# Altium PCB NUC_power.PcbDoc
Units mm, origin at the board's own origin, x right, y up, seen from the top; angles counter-clockwise.
Board outline 91 x 23 mm, 4 copper layers (Top Layer, Internal Plane 1, Internal Plane 2, Bottom Layer), stack 1.782 mm thick; 11 components, 5 nets, 31 pads, 2 vias.
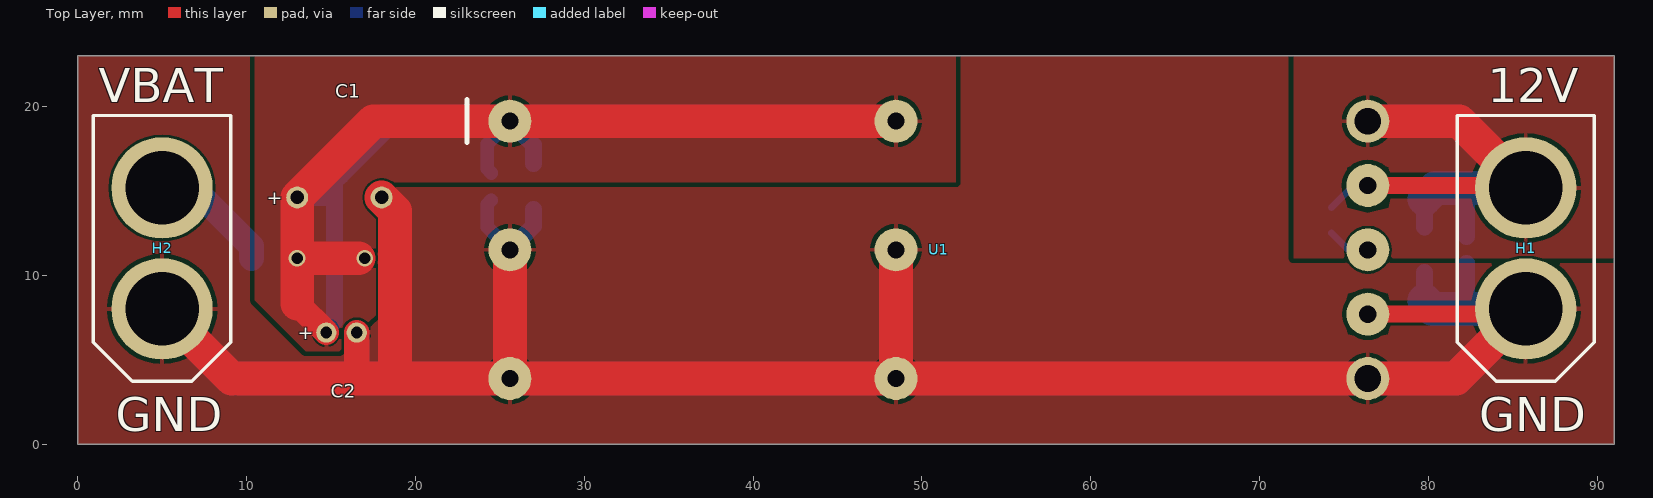
[diagram p0: Top Layer view]
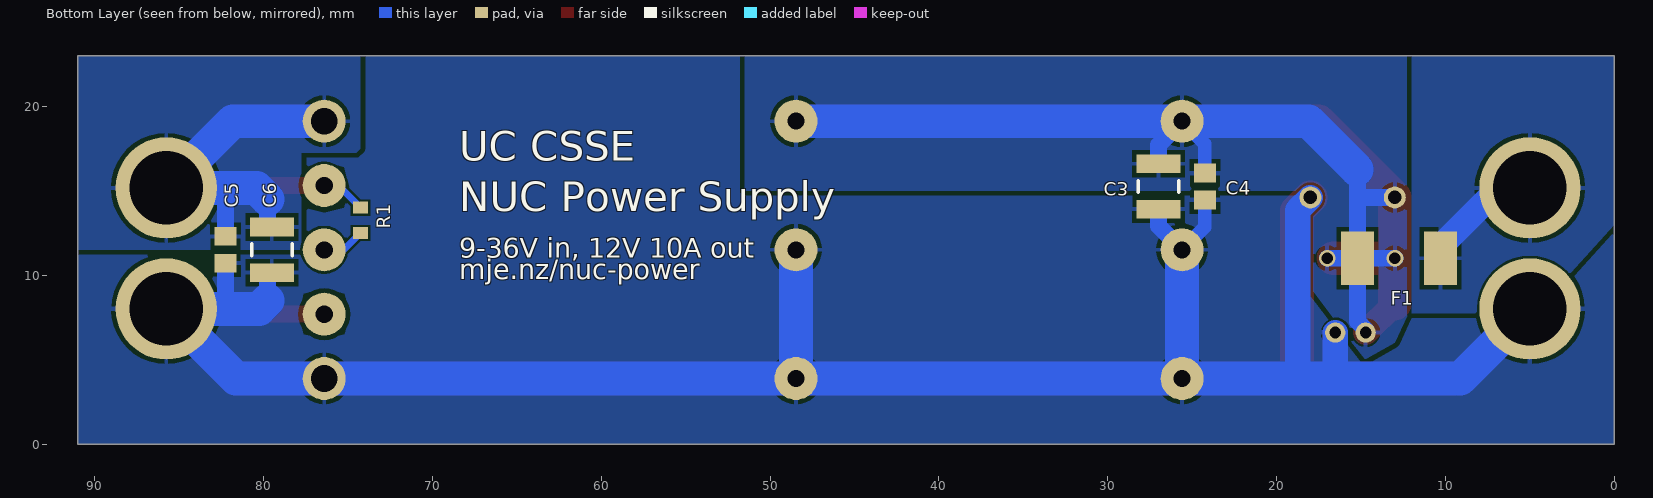
[diagram p1: Bottom Layer view, seen from below]
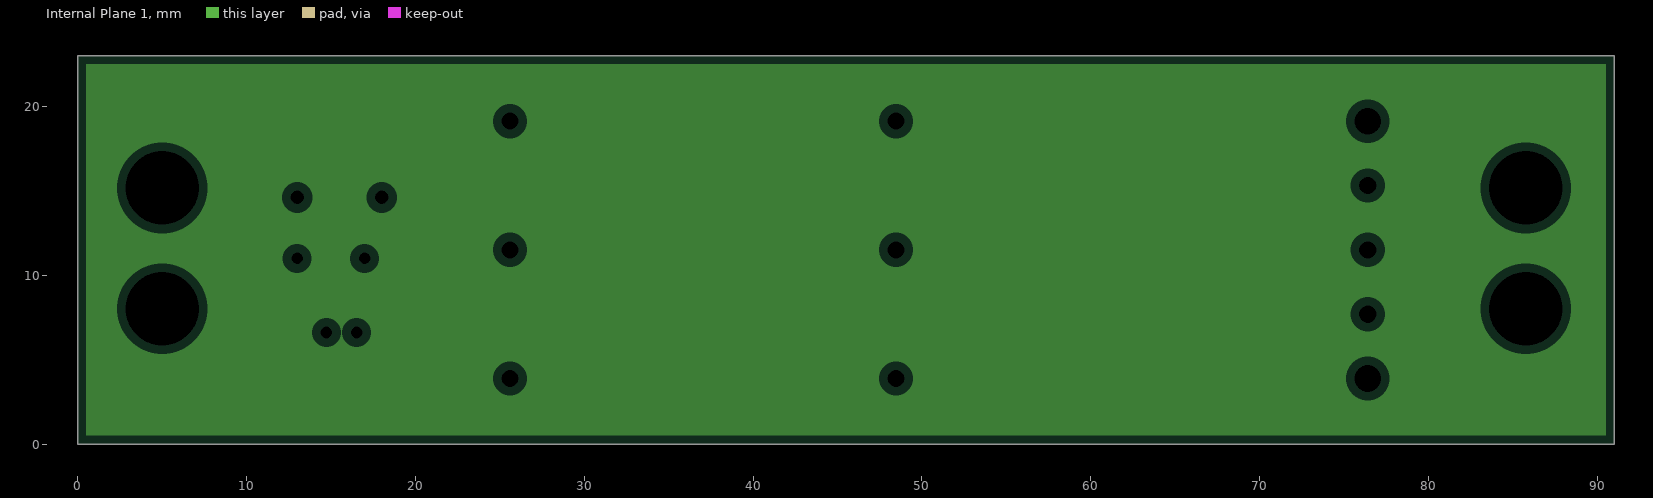
[diagram p2: Internal Plane 1, clearances drawn from the general rule]
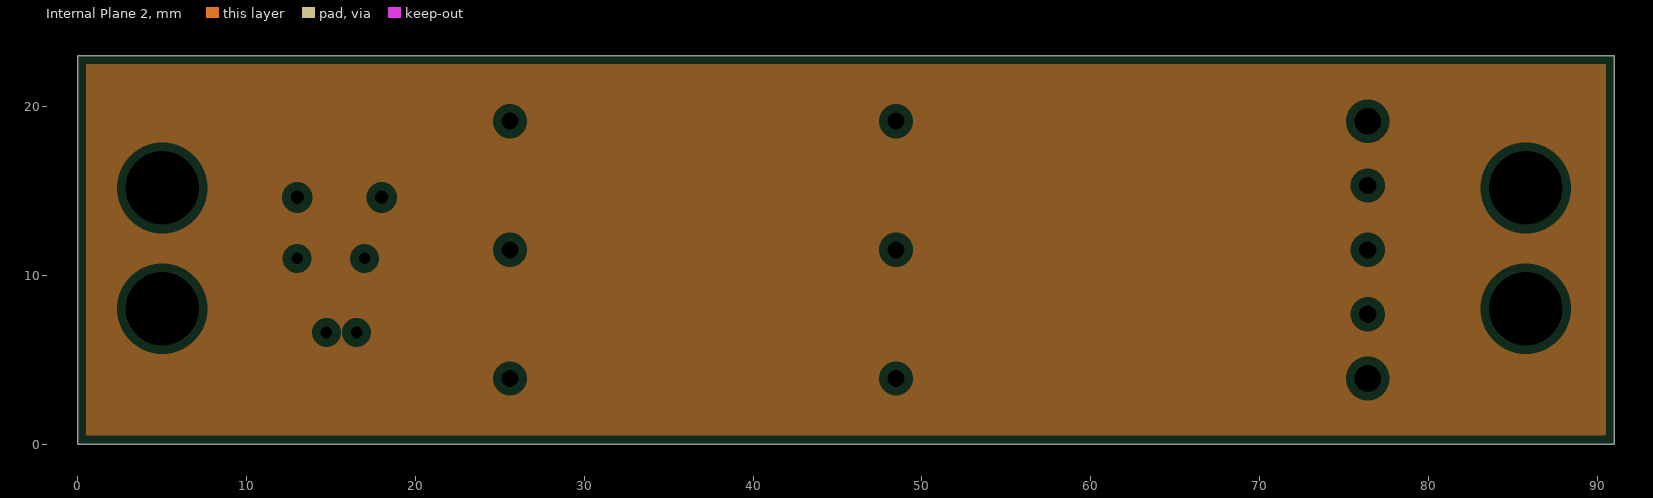
[diagram p3: Internal Plane 2, clearances drawn from the general rule]

## Layer stack, top to bottom
Top Solder: solder mask 0.0102, Solder Resist, Dk 3.5
Top Layer: signal copper 0.0356
Dielectric1: prepreg 0.32, FR-4, Dk 4.8
Internal Plane 1: plane copper 0.0356
Dielectric2: core 1, FR-4, Dk 4.8
Internal Plane 2: plane copper 0.0356
Dielectric3: prepreg 0.32, FR-4, Dk 4.8
Bottom Layer: signal copper 0.0356
Bottom Solder: solder mask 0.0102, Solder Resist, Dk 3.5

## Board outline
0,0 91,0 91,23 0,23

## Design rules (kind name [scope] priority, off if disabled: settings)
Clearance Min_Clearance [All] p1: gap=0.15 except(0.3: Poly-Poly Poly-Region Region-Region)
FanoutControl Fanout_BGA [IsBGA] p1 off: bgadir=Out bgaviamode=Centered fanoutstyle=Auto fanoutdirection=Alternating viagrid=0.025 // Fanout_BGA (Default Rule)
HoleSize [All] p1: absolutevalues=TRUE maxlimit=10 minlimit=0.3 maxpercent=80.000 minpercent=20.000
MinimumAnnularRing [All] p1: minimumring=0.1
MinimumSolderMaskSliver [All] p1: minsoldermaskwidth=0.25
NetAntennae [All] p1: netantennaetolerance=1
PasteMaskExpansion [All] p1 off: expansion=0.2
PlaneClearance [All] p1: clearance=0.508
PlaneConnect [All] p1: planeconnectstyle=Relief reliefexpansion=0.508 reliefentries=4 reliefconductorwidth=0.254 reliefairgap=0.254
PolygonConnect [All] p1: connectstyle=Relief reliefconductorwidth=0.254 reliefentries=4 polygonreliefangle="90 Angle" airgapwidth=0.254
RoutingVias [All] p1: holewidth=0.5 width=1 viastyle="Through Hole" minholewidth=0.3 minwidth=0.6 maxholewidth=1 maxwidth=2
SMDNeckDown [All] p1 off: percent=50.000
SMDToCorner [All] p1: distance=98425
SMDToPlane [All] p1: distance=1968504
SilkToSolderMaskClearance SilkscreenOverComponentPads [IsPad] p1: minsilkscreentomaskgap=0.254 clearancetoexposedcopper=TRUE
SolderMaskExpansion [All] p1: expansion=0.102
ViasUnderSMD [All] p1: allowed=FALSE
Width [All] p1: maxlimit=2 minlimit=0.15 preferedwidth=0.3
22 further rules are at their usual default settings.

## Components (designator, comment, footprint, x,y, rotation, side; value= is the part's Value field where it differs from the comment)
C1 "330uF" CAP_16x10 15.5,14.6 r0 top
C2 "33uF" CAP_11x5 15.626,6.6 r0 top
C3 "10uF" CAPC3225L 27,15.25 r90 bottom
C4 "1uF" CAPC2012L 24.25,15.25 r90 bottom
C5 "1uF" CAPC2012L 82.25,11.5 r90 bottom
C6 "10uF" CAPC3225L 79.5,11.5 r90 bottom
F1 "20A 65V" 2410_FUSE 12.75,11 r0 bottom
H1 "XT60" XT60 85.75,8 r90 top
H2 "XT60" XT60 5,8 r90 top
R1 "1M" RESC1608L 74.25,13.25 r90 bottom
U1 "UWE-12/10-Q12NB-C" "MURATA_UWE-100-120W with 1/16" 51,11.5 r0 top locked

## Footprints (in the part's own frame and the unit in brackets; to place one, negate y for a bottom-side part, rotate by r counter-clockwise, add the part's x,y. Pads: shape width x height; smd on the part's side, far side on the other; paste and mask are expansions set on the pad)
2410_FUSE [mm]
  rect 1.96x3.15 smd: 0(-2.455,0) 1(2.455,0)
CAP_11x5 [mm]
  round 1.2 hole 0.7: 1(-0.9,0) 2(0.9,0)
  body extent -2.5,-2.5 2.5,2.5, height 13
CAP_16x10 [mm]
  round 1.3 hole 0.8: 1(-2.5,0) 2(2.5,0)
  body extent -5,-5 5,5, height 18
CAPC2012L [mm] "Chip Capacitor, Body 2.0x1.3mm, IPC High Density"
  rect 1.1x1.3 smd: 1(-0.8,0) 2(0.8,0)
  body extent -1.1,-0.72 1.1,0.72, height 1.1
CAPC3225L [mm] "Chip Capacitor, Body 3.2x2.5mm, IPC High Density"
  rect 1.1x2.6 smd: 1(-1.35,0) 2(1.35,0)
  silkscreen extent -0.35,-1.2 0.35,1.2, body extent -1.7,-1.35 1.7,1.35, height 1.35
"MURATA_UWE-100-120W with 1/16" [mil] "UWE-100-120W with extra 1/16 footprint added"
  round 100 hole 40: 1(-1000,300) 1(-100,300) 2(-1000,0) 2(-100,0) 3(-1000,-300) 3(-100,-300) 5(1000,-150) 6(1000,0) 7(1000,150)
  round 100 hole 62: 4(1000,-300) 8(1000,300)
  silkscreen extent -1100,250 -1100,350, body extent -1150,-450 1150,450, height 483
RESC1608L [mm] "Chip Resistor, Body 1.6x0.8mm, IPC High Density"
  rect 0.7x0.9 smd: 1(-0.75,0) 2(0.75,0)
  body extent -0.85,-0.48 0.85,0.48, height 0.9
XT60 [mm] "XT60 connector"
  round 6 hole 4.35: 1(0,0) 2(7.163,0)
  silkscreen extent -4.28,-4.06 11.45,4.06

## Part data
C1: library part CAP_TH_330U, "Cap TH 330uF 50V"
C2: library part CAP_TH_33U, "Cap TH 33uF 50V"
C3 C6: library part CC_10uF_1210, "CAP CER 10UF X7S +-10% 50V 1210"
C4 C5: library part CC_1uF_0805, "CAP CER 1uF X7R +-10% 50V 0805"
F1: library part FUSE_20A, "FUSE FAST BLOW 20A 65V 2410"
H1 H2: "XT60 Connector Male/Female"
R1: library part RS_1M, "RES 1.0M OHM 1/10W 5% 0603 SMD"
U1: "Isolated Module DC DC Converter 1 Output 12V 10A 9V - 36V Input"

## Via types
v1: diameter 1, hole 0.7, Top Layer to Bottom Layer, 2 vias

## Nets (pads, with @x,y where several pads share a name; then routed paths per layer and width w, separated by ;. In a path a pad name is that pad's centre, name@x,y a point inside that pad or via, vN(x,y) a via of type N, cw(c..) or ccw(c..) an arc to the next point about the centre after c; other vN are vias at no path point)
GND: C1.2 C2.2 C3.1 C4.1 C5.1 C6.1 H1.1 H2.1 U1.2 U1.3 U1.4 U1.5 | length 252.5
  Top Layer w1: U1.5 H1.1@85.44,7.69
  Top Layer w1.5: 16.526,3.954 C2.2
  Top Layer w2: H2.1 9.12,3.88 ; 9.58,3.88 18.8,3.88 ; C1.2 18.8,13.8 18.8,3.88 ; U1.2@25.6,11.5 U1.3@25.6,3.88 ; U1.2@48.46,11.5 U1.3@48.46,3.88 ; H1.1@85.44,7.19 H1.1@85.44,7.69 ; H1.1 H1.1@85.44,7.69 ; 18.8,3.88 U1.3@25.6,3.88 ; U1.3@25.6,3.88 U1.3@48.46,3.88 ; U1.3@48.46,3.88 U1.4 81.63,3.88 H1.1@85.44,7.69
  Bottom Layer w0.8: C4.1@24.5,14.45 24.25,14.2 24.25,12.85 U1.2@25.6,11.5
  Bottom Layer w1: U1.2@25.6,11.5 27,12.9 C3.1 ; 79.75,8.5 C6.1@79.75,10.15 ; 82.25,8 C5.1
  Bottom Layer w1.5: 16.526,3.906 C2.2 ; C1.2 18.75,13.85 18.75,3.88
  Bottom Layer w2: H2.1 9.12,3.88 U1.3@25.6,3.88 ; U1.2@25.6,11.5 U1.3@25.6,3.88 ; U1.2@48.46,11.5 U1.3@48.46,3.88 ; 79.75,8.5 80.25,8 82.25,8 H1.1 81.63,3.88 U1.4 U1.3@48.46,3.88 ; U1.3@25.6,3.88 U1.3@48.46,3.88
NetR1_1: R1.1 U1.6 | length 2.6
  Bottom Layer w0.4: R1.1 75.25,11.5 U1.6
VIN: F1.0 H2.2 | length 7.4
  Bottom Layer w1.5: H2.2 6.837,15.163 10.295,11.705 F1.0
VIN_FUSED: C1.1 C2.1 C3.2 C4.2 F1.1 U1.1 | length 106.8
  Top Layer w1.5: 13,8.326 C2.1
  Top Layer w2: 13,8.326 v1(13,11) ; v1@16.65,11 v1(13,11) ; U1.1@48.46,19.12 25.6,19.12 17.52,19.12 C1.1 13,12.75 v1(13,11)
  Bottom Layer w0.8: C4.2@24.5,16.05 24.25,16.3 24.25,17.77 U1.1@25.6,19.12
  Bottom Layer w1: v1(13,11) F1.1 ; C1.1 15.105,14.6 ; C2.1 14.726,6.78 15.205,7.259 F1.1 ; 15.205,16.205 F1.1 ; v1(17,11) F1.1 ; U1.1@25.6,19.12 27,17.72 C3.2
  Bottom Layer w2: 15.25,16.25 18.12,19.12 25.6,19.12 U1.1@48.46,19.12
VOUT: C5.2 C6.2 H1.2 R1.2 U1.7 U1.8 | length 43.5
  Top Layer w1: U1.7 H1.2@84.44,15.31
  Top Layer w2: U1.8 81.793,19.12 H1.2
  Bottom Layer w0.4: R1.2 75.56,15.31 U1.7
  Bottom Layer w1: C6.2@79.75,12.85 79.75,14.5 ; C5.2 82.25,15.163
  Bottom Layer w2: U1.8 81.793,19.12 H1.2 82.25,15.163 80.413,15.163 79.75,14.5

## Polygon pours and split planes (outlines as drawn)
VOUT on Bottom Layer "Bottom_VOUT" (solid, pour order 0): 91,23 91,11.5 77.75,11.5 77.75,17.25 74.5,17.25 74.25,17.5 74.25,23
VIN on Bottom Layer "Bottom_VIN" (solid, pour order 4): 0,23 12,23 12,7.75 4.75,7.75 0,13
VIN_FUSED on Bottom Layer "Bottom_VIN_FUSED" (solid, pour order 14): 14.75,5 18,9.25 18,15 22.75,15 51.5,15 51.5,23 12,23 12,8.2 13,6
GND on Bottom Layer "Bottom_IGND" (solid, pour order 20): 0,23 91,23 91,0 0,0
VIN_FUSED on Top Layer "Top_VIN_FUSED" (solid, pour order 22): 10.5,23 52,23 52,15.5 22,15.5 18.75,15.5 18.75,8.75 15.5,5.5 13.5,5.5 10.5,8.5
VOUT on Top Layer "Top_VOUT" (solid, pour order 24): 91,23 72,23 72,11 91,11
GND on Top Layer "Top_GND" (solid, pour order 26): 0,23 0,0 91,0 91,23
no net on Internal Plane 1 (split plane): 90.49,0.51 0.51,0.51 0.51,22.49 90.49,22.49
no net on Internal Plane 2 (split plane): 90.49,0.51 0.51,0.51 0.51,22.49 90.49,22.49

## Other copper
Top Layer:
  pour cut-out: 77.25,16.06 83,16.06 83,14.56 77.25,14.56
  pour cut-out: 77.25,8.5 83,8.5 83,7 77.25,7
Multi-Layer:
  pour cut-out: 75.2,8.9 76.4,9.2 77.6,8.9 77.9,7.7 77.6,6.5 76.4,6.2 75.2,6.5 74.9,7.7
  pour cut-out: 75.2,16.4 76.4,16.7 77.6,16.4 77.9,15.2 77.6,14 76.4,13.7 75.2,14 74.9,15.2

## Silkscreen, mask and mechanical layers (free items; w line width, h text height)
Top Overlay:
  text "VBAT" at 1.25,20.25 h2
  text "12V" at 83.5,20.25 h2
  text "GND" at 2.25,0.75 h2
  text "GND" at 83,0.75 h2
Bottom Overlay:
  text "UC CSSE / NUC Power Supply" at 68.41,13.18 h3
  text "9-36V in, 12V 10A out" at 68.41,10.64 h2
  text "mje.nz/nuc-power" at 68.41,9.37 h2
PCB Boundary:
  the board outline again, w0.3
Drill Drawing:
  text ".LEGEND" at 97,-3.75 h0.8
  text "Drill Drawing." at 96.75,-5.5 h0.8

## Dimensions
0,0 to 91,0 on Dimension
0,0 to 0,23 on Dimension

## Text inside footprints (layer, text, board x,y; h text height)
C1: Top Overlay "+" at 11.2,14.2 h0.81
C2: Top Overlay "+" at 13.026,6.2 h0.81